# Altium PCB UI_PCB.PcbDoc (part 5 of 5)
Units mm, origin at the board's own origin, x right, y up, seen from the top; angles counter-clockwise.
Board outline 164.97 x 129.99 mm, 4 copper layers (SIG/PWR1, GND1, GNS2, SIG/PWR2), stack 1.18 mm thick; 237 components, 216 nets, 913 pads, 655 vias.
Unrouted connection lines stored in the file: 177.
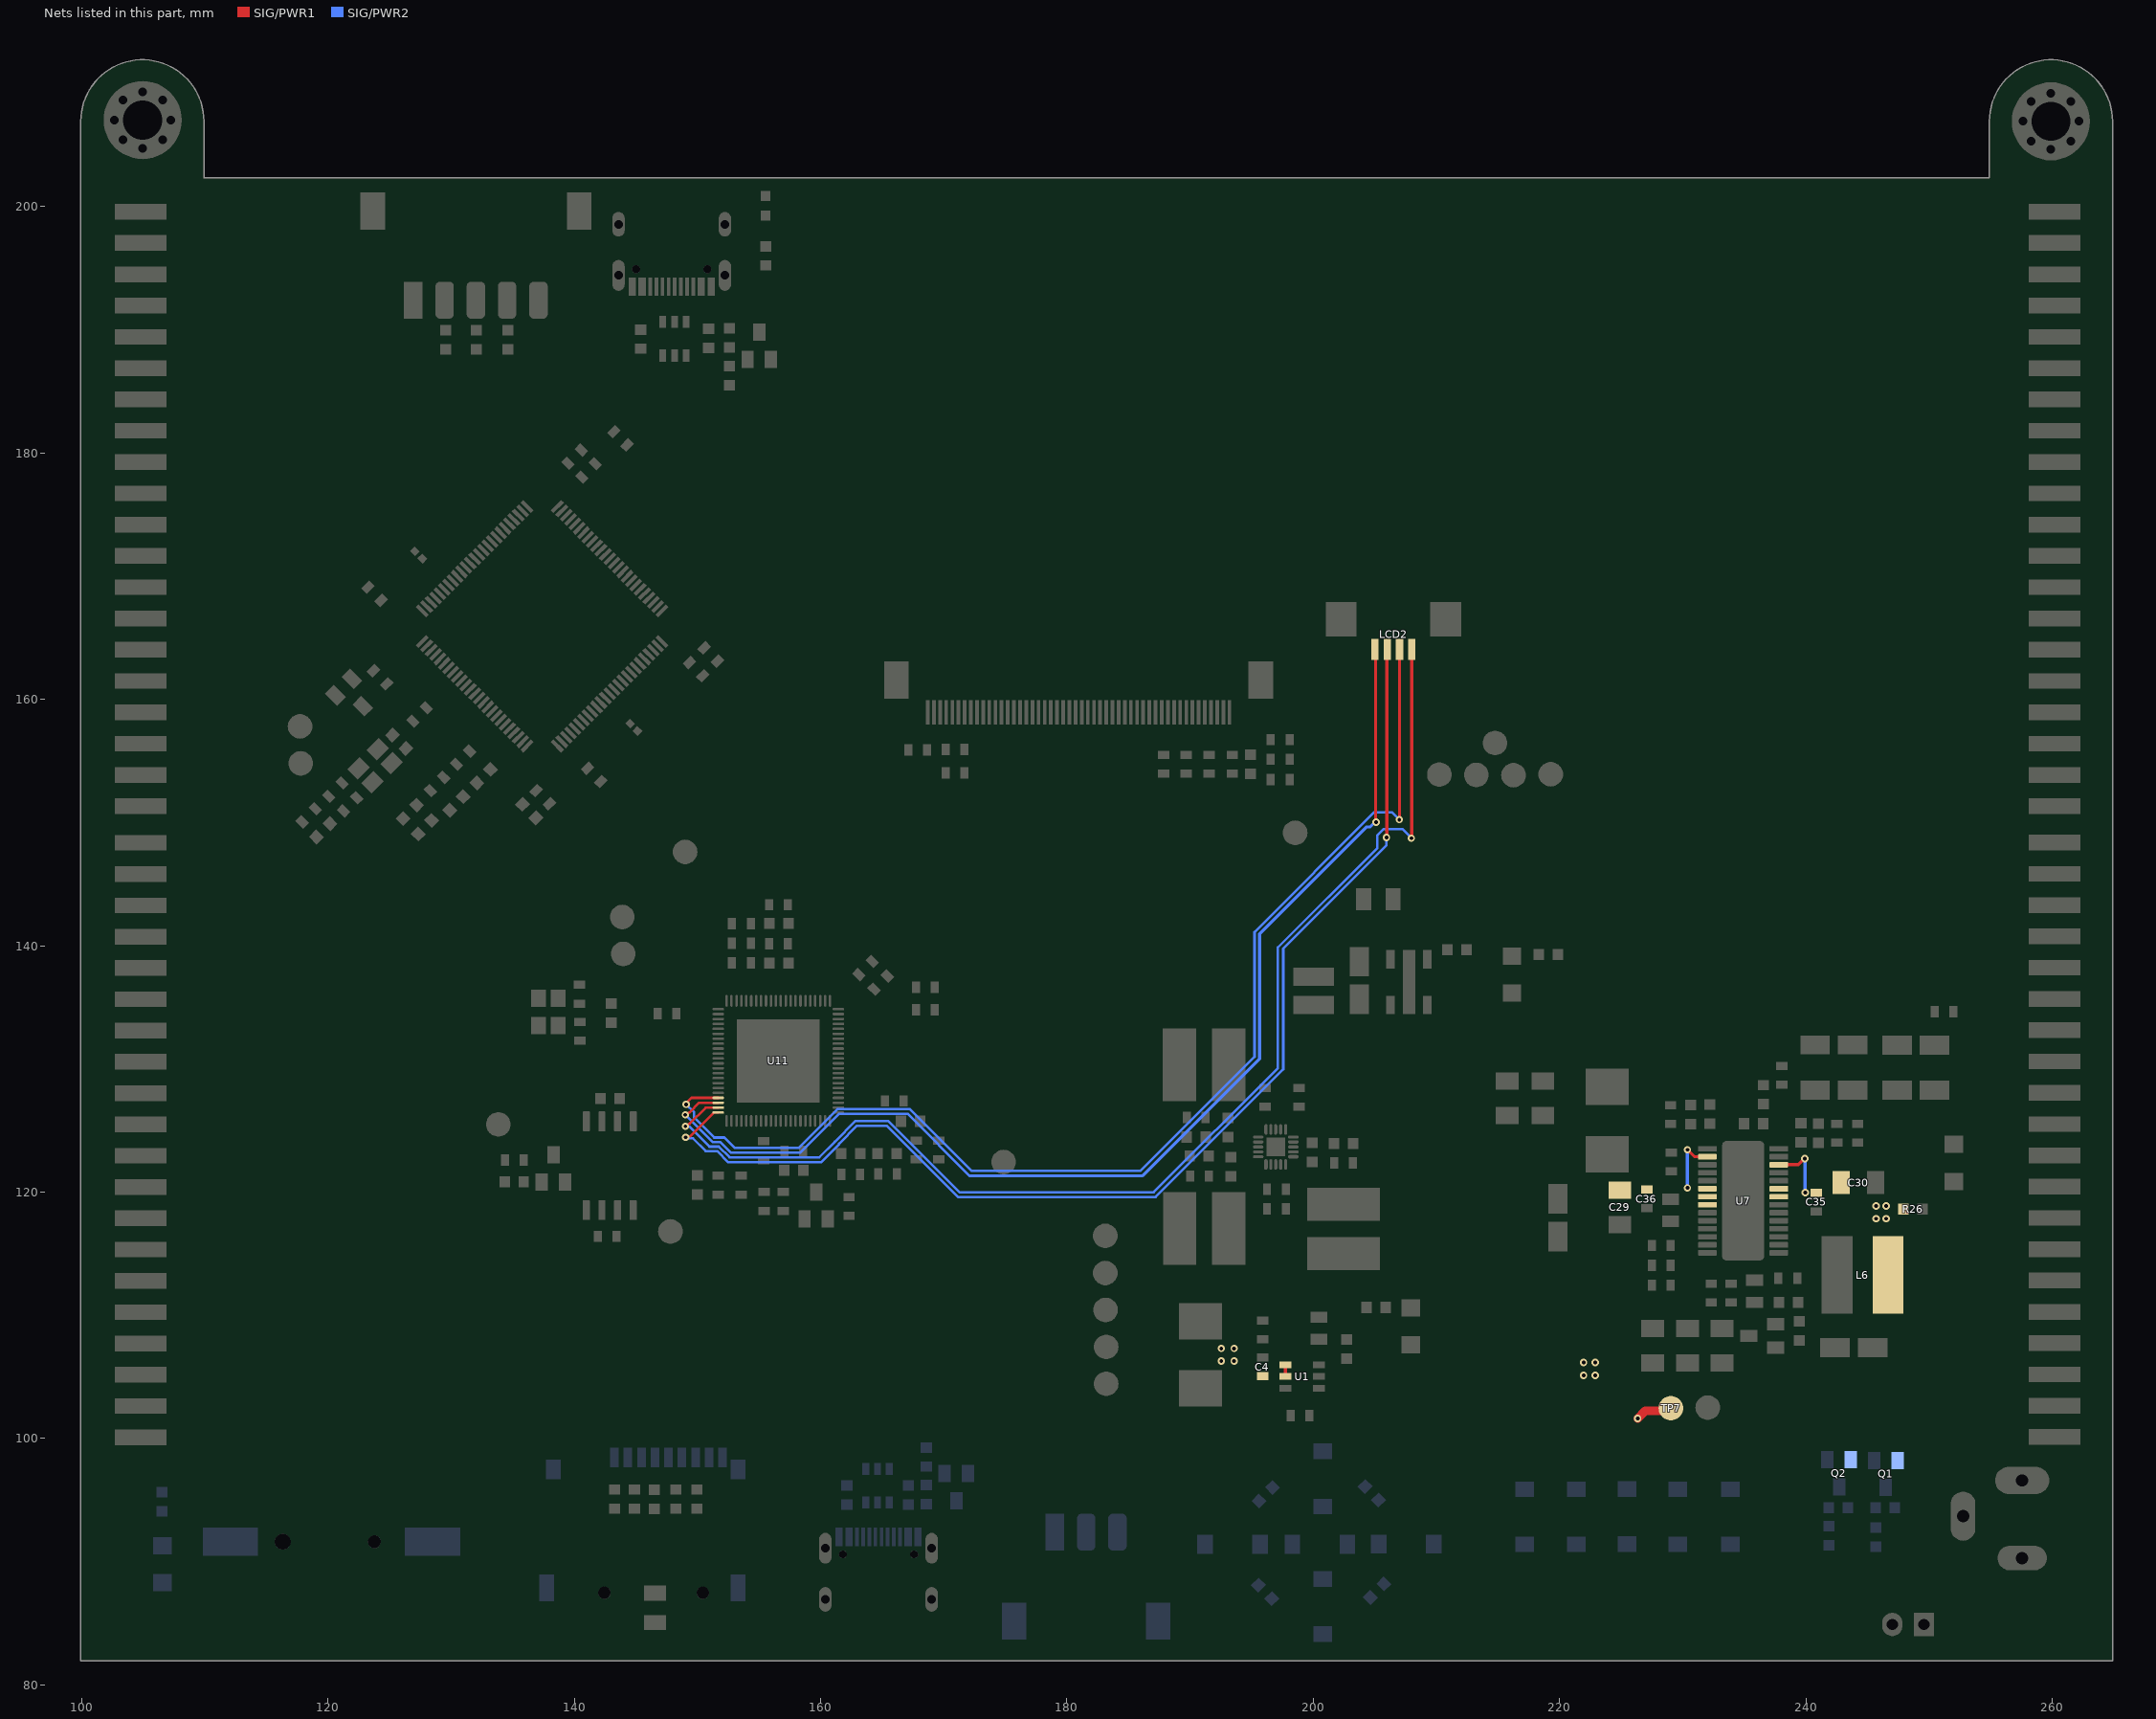
[diagram p6: the nets of this part, all layers, seen from the top]

## Via types
v1: diameter 0.6, hole 0.3, SIG/PWR1 to SIG/PWR2, tented both sides, 644 vias
v2: diameter 0.6, hole 0.3, SIG/PWR1 to SIG/PWR2, tented bottom, 10 vias
v3: diameter 0.8, hole 0.4, SIG/PWR1 to SIG/PWR2, tented both sides, 1 vias

## Nets (pads, with @x,y where several pads share a name; then routed paths per layer and width w, separated by ;. In a path a pad name is that pad's centre, name@x,y a point inside that pad or via, vN(x,y) a via of type N, cw(c..) or ccw(c..) an arc to the next point about the centre after c; other vN are vias at no path point) (continued)
Vsupply: C4.1 C29.2 C30.2 C35.2 C36.2 L6.1 Q1.2 Q2.2 R26.1 TP7.1 U1.4 U1.5 U7.8 U7.9 U7.12 U7.16 U7.20 U7.21 U7.22 | length 14
  SIG/PWR1 w0.254: U1.5@197.726,105.039 U1.4@197.726,105.989 ; v1@230.386,123.444 230.949,122.881 U7.16@231.998,122.881 ; U7.12@237.798,122.23 239.401,122.23 v1(239.903,122.733)
  SIG/PWR1 w0.712: v1(226.339,101.625) 226.964,102.25 228.818,102.25 TP7.1@229.032,102.464
  SIG/PWR2 w0.254: v1(230.378,120.345) v1(230.378,123.444) ; v1(239.903,122.733) 239.928,122.707 239.928,119.99 v1(239.954,119.964)
  other v1: 221.945,105.131 222.885,105.131 221.945,106.172 222.885,106.172 192.532,106.299 193.573,106.299 192.532,107.315 193.573,107.315 245.694,117.856 246.512,117.856 245.694,118.872 246.512,118.872
X+: LCD2.3 U11.63 | length 98
  SIG/PWR1 w0.2: v1(149.085,127.126) 149.085,127.227 149.517,127.659 U11.63@151.688,127.659
  SIG/PWR1 w0.254: v1(206.985,150.241) 206.993,150.25 206.993,164.064 LCD2.3@207.002,164.072
  SIG/PWR2 w0.2: v1(149.085,127.126) 149.733,126.478 149.733,126.06 151.359,124.435 152.186,124.435 153.035,123.585 158.218,123.585 161.382,126.749 167.231,126.749 172.237,121.742 185.979,121.742 195.228,130.992 195.228,141.115 204.958,150.844 206.381,150.844 v1(206.985,150.241)
X-: LCD2.1 U11.64 | length 95.7
  SIG/PWR1 w0.2: v1(149.01,126.276) 149.118,126.276 149.314,126.472 149.356,126.472 150.143,127.259 U11.64@151.688,127.259
  SIG/PWR1 w0.254: LCD2.1@205.002,164.072 205.053,164.021 205.053,150.089 v1(205.105,150.038)
  SIG/PWR2 w0.2: v1(149.01,126.276) 149.023,126.276 151.245,124.054 151.866,124.054 152.712,123.207 158.335,123.207 161.499,126.371 167.05,126.371 172.085,121.336
  SIG/PWR2 w0.254: 172.085,121.336 186.145,121.336 195.646,130.837 195.646,140.96 204.343,149.657 204.631,149.657 205.011,150.038 v1(205.105,150.038)
Y+: LCD2.4 U11.65 | length 101.1
  SIG/PWR1 w0.2: v1(149.023,125.35) 149.131,125.35 149.326,125.545 149.349,125.545 150.664,126.859 U11.65@151.688,126.859
  SIG/PWR1 w0.254: v1(207.963,148.741) 207.982,148.761 207.982,164.053 LCD2.4@208.002,164.072
  SIG/PWR2 w0.2: v1(149.023,125.35) 149.075,125.298 149.378,125.298 150.978,123.698 151.727,123.698 152.595,122.829 159.896,122.829 161.147,124.081 161.147,124.092 162.836,125.781 165.481,125.781 171.272,119.99 187.04,119.99 197.129,130.079 197.129,139.879 205.207,147.956 205.207,148.981 205.704,149.479 207.225,149.479 v1(207.963,148.741)
Y-: LCD2.2 U11.66 | length 98.4
  SIG/PWR1 w0.2: v1(149.042,124.455) 149.118,124.531 149.384,124.531 151.313,126.459 U11.66@151.688,126.459
  SIG/PWR1 w0.254: v1(205.943,148.793) 205.973,148.823 205.973,164.043 LCD2.2@206.002,164.072
  SIG/PWR2 w0.2: v1(149.042,124.455) 149.118,124.378 149.637,124.378 150.673,123.342 151.587,123.342 152.502,122.428 160.018,122.428 161.497,123.907 161.497,123.947 162.953,125.403 165.364,125.403 171.155,119.612 187.197,119.612 197.561,129.976 197.561,139.776 205.943,148.158 v1(205.943,148.793)
pads on no net: BAT1. LCD1.45 LCD1.49 LCD1.50 U7.19 U11.37 U11.38 U11.39 U11.40 U11.72 U11.75 U11.76 U11.77 U11.78 U11.84 U11.85 U11.86 U11.87 USB1.A8 USB1.B8 USB2.A8 USB2.B8

## Polygon pours and split planes (outlines as drawn)
GND on SIG/PWR1 "NONET_L04_P-001" (solid, remove dead copper, pour order 170): 99.924,81.94 264.897,81.94 264.897,210.769 263.728,211.938 101.524,211.938 99.924,210.337
"3V3 LCD" on SIG/PWR1 "3V3_LCD_L01_P169" (solid, remove dead copper, pour order 169): 145.199,182.41 146.342,181.267 143.612,178.537 142.469,179.68
VLED+ on SIG/PWR1 "NONET_L04_P-001" (solid, pour order 108): 169.291,159.664 169.291,164.922 170.637,166.268 196.418,166.268 202.743,159.944 202.743,145.771 208.534,145.771 208.534,141.351 208.534,138.633 210.058,138.633 210.261,138.836 211.201,138.836 211.201,147.396 204.394,147.396 204.394,160.909 197.129,168.173 169.85,168.173 167.513,165.837 167.513,160.985 168.834,159.664
VLED- on SIG/PWR1 "NONET_L04_P-001" (solid, pour order 107): 202.438,137.16 202.438,159.868 196.317,165.989 170.739,165.989 169.545,164.795 169.545,159.41 170.383,159.41 170.383,160.249 170.688,160.553 170.688,164.313 170.866,164.49 195.758,164.49 200.965,159.283 200.965,142.519 197.764,139.319 197.764,137.16
"3V3 LCD" on SIG/PWR1 "NONET_L04_P-001" (solid, pour order 40): 191.846,159.741 187.477,159.741 187.477,162.814 187.63,162.966 187.655,162.941 191.846,162.941
"3V3 LCD" on SIG/PWR1 "NONET_L04_P-001" (solid, pour order 39): 172.339,153.924 170.967,153.924 170.967,164.084 191.999,164.084 191.846,164.084 191.846,157.709 196.977,157.709 196.977,155.118 192.938,155.118 192.938,155.931 191.364,157.505 191.059,157.505 191.059,158.267 190.881,161.671 189.789,162.763 173.33,162.763 172.339,161.773
5V on SIG/PWR1 "NONET_L04_P-001" (solid, pour order 5): 188.925,108.001 194.158,108.001 195.224,109.068 204.927,109.068 204.927,112.116 189.89,112.116 188.925,111.15
3V3 on SIG/PWR1 "NONET_L04_P-001" (solid, pour order 80): 142.926,115.214 145.644,115.214 145.644,120.802 143.358,120.802 142.926,120.371
2.5V on SIG/PWR1 "2.5V_L01_P161" (solid, pour order 161): 158.14,138.106 157.353,138.106 157.353,136.322 156.947,135.915 156.947,134.645 157.582,134.645 158.14,135.204
5V on SIG/PWR1 "NONET_L04_P-001" (solid, pour order 14): 196.545,125.095 196.977,125.095 196.977,126.238 197.739,126.238 197.739,125.095 198.095,125.095 198.095,126.263 199.542,126.263 199.542,127.914 195.453,127.914 195.453,126.644 196.291,125.806 196.545,125.552
NetL3_2 on SIG/PWR1 "NONET_L04_P-001" (solid, pour order 10): 198.78,123.012 198.78,121.945 200.279,120.447 205.537,120.447 205.537,117.627 205.359,117.45 199.492,117.45 198.831,118.11 198.831,121.133 198.145,121.818 198.145,122.809 198.145,123.012
Vsupply on SIG/PWR1 "NONET_L04_P-001" (solid, pour order 124): 221.183,118.643 223.622,118.643 223.622,104.419 221.183,104.419
1.1V on SIG/PWR1 "NONET_L04_P-001" (solid, pour order 17): 190.271,123.831 190.551,124.11 190.551,134.041 187.554,134.041 187.249,133.737 187.249,123.805
5V on SIG/PWR1 "NONET_L04_P-001" (solid, pour order 159): 156.312,186.385 155.575,186.385 153.822,184.633 151.892,184.633 151.892,184.658 150.266,186.284 149.581,186.284 149.581,182.931 149.606,182.905 153.518,182.905 156.312,185.699
NetJ1_3 on SIG/PWR1 "NETJ1_3_L01_P002" (solid, pour order 2): 248.514,99.136 248.514,99.06 248.514,82.753 254.509,82.753 254.533,99.136 248.564,99.136
3V3 on SIG/PWR1 "3V3_L01_P003" (solid, pour order 3): 152.095,94.847 152.095,85.979 141.072,85.979 141.072,94.794
NetR1_1 on SIG/PWR1 "NONET_L04_P-001" (solid, pour order 6): 201.727,108.572 201.727,105.55 199.212,105.55 199.212,108.572
NetC1_1 on SIG/PWR1 "NONET_L04_P-001" (solid, pour order 7): 188.976,105.639 188.976,102.413 189.84,101.549 196.748,101.549 197.358,100.94 198.45,100.94 198.476,100.965 198.476,104.496 197.231,104.496 197.104,104.369 193.446,104.369 192.913,104.902 192.913,105.639
Vsupply on SIG/PWR1 "NONET_L04_P-001" (solid, pour order 8): 192.126,107.721 192.126,105.867 194.005,105.867 195.275,104.597 198.145,104.597 198.272,104.724 198.272,105.385 198.12,105.537 195.605,105.537 194.742,106.401 194.742,107.391 194.412,107.721
5V on SIG/PWR1 "NONET_L04_P-001" (solid, pour order 9): 196.469,122.73 196.887,122.721 198.425,121.183 198.425,110.642 196.469,110.642 196.469,121.31
NetL4_2 on SIG/PWR1 "NONET_L04_P-001" (solid, pour order 12): 196.123,122.606 196.291,122.606 196.291,121.764 195.072,120.193 195.072,113.36 191.313,113.36 191.313,120.117 191.516,120.32 194.666,120.726
NetL5_2 on SIG/PWR1 "NONET_L04_P-001" (solid, pour order 13): 196.291,125.425 195.199,126.441 195.199,126.797 195.199,133.502 191.668,133.502 191.414,133.248 191.44,133.223 191.44,127.254 193.573,127.254 195.637,124.866 196.291,124.866
2.5V on SIG/PWR1 "NONET_L04_P-001" (solid, pour order 15): 190.805,123.495 190.805,113.36 187.808,113.36 187.503,113.665 187.503,123.495
3V3 on SIG/PWR1 "NONET_L04_P-001" (solid, pour order 18): 202.844,124.917 202.844,120.879 205.562,120.879 205.918,120.523 205.918,117.551 205.511,117.145 199.365,117.145 199.06,116.84 199.06,113.589 199.39,113.259 206.4,113.259 207.874,114.732 207.874,124.917
NetR1_1 on SIG/PWR1 "NONET_L04_P-001" (solid, pour order 21): 199.936,108.572 203.276,108.572 203.276,107.34 199.936,107.34
NetD3_2 on SIG/PWR1 "NONET_L04_P-001" (solid, pour order 22): 237.058,116.815 237.058,117.907 239.612,117.907 244.627,117.246 244.627,110.007 246.888,108.407 246.888,106.324 244.221,106.324 244.119,106.324 244.119,106.629 244.119,108.483 241.071,110.007 241.071,115.697 239.954,116.815
NetC31_2 on SIG/PWR1 "NONET_L04_P-001" (solid, pour order 23): 233.324,110.338 233.324,111.684 233.35,111.684 234.874,111.684 234.874,110.312 239.795,110.312 240.233,110.084 243.891,108.306 243.891,106.426 241.122,106.426 241.046,106.502 241.046,108.153 240.513,108.687 236.81,108.687 236.88,108.687
10.4V on SIG/PWR1 "NONET_L04_P-001" (solid, pour order 0): 224.003,107.671 235.788,107.671 235.788,108.871 233.232,110.109 224.003,110.109
Vsupply on SIG/PWR1 "NONET_L04_P-001" (solid, pour order 25): 237.084,119.405 241.681,119.405 241.681,117.907 244.907,117.5 244.907,110.134 247.294,108.433 248.539,108.407 248.539,119.532 244.399,119.532 244.399,121.971 241.63,121.971 240.182,120.523 237.058,120.523
NetC31_2 on SIG/PWR1 "NONET_L04_P-001" (solid, pour order 26): 239.903,115.24 238.43,113.767 238.43,109.753 240.716,109.753 240.716,115.621 239.903,116.332
Vsupply on SIG/PWR1 "NONET_L04_P-001" (solid, pour order 27): 221.209,121.336 228.016,121.336 228.498,120.853 228.524,120.879 230.81,120.879 231.216,120.472 232.715,120.472 232.715,118.745 230.861,118.745 229.845,120.142 228.368,120.142 225.193,118.643 221.183,118.643
NetC42_1 on SIG/PWR1 "NONET_L04_P-001" (solid, pour order 28): 218.796,118.059 220.421,118.059 220.929,118.567 220.929,121.59 228.092,121.59 228.397,121.285 229.591,121.285 230.048,121.742 229.438,122.352 228.346,122.352 226.06,124.638 218.796,124.638
"3V3 LCD" on SIG/PWR1 "NONET_L04_P-001" (solid, pour order 30): 214.554,124.917 214.554,127.737 219.761,127.737 219.761,128.27 221.996,130.505 231.292,130.505 231.292,126.467 231.14,126.314 227.533,126.314 226.136,124.917 217.348,124.917
NetC39_2 on SIG/PWR1 "NONET_L04_P-001" (solid, pour order 32): 241.935,125.095 243.078,125.095 243.078,125.984 244.475,127.381 245.135,127.381 245.135,132.893 245.11,132.867 242.24,132.867 242.24,127.279 241.935,125.984
-7V on SIG/PWR1 "NONET_L04_P-001" (solid, pour order 33): 238.049,126.848 240.386,126.848 240.386,125.019 241.681,125.019 241.681,127.051 242.037,127.406 242.037,129.159 237.592,129.159 237.592,129.057
16V on SIG/PWR1 "NONET_L04_P-001" (solid, pour order 34): 249.072,131.064 249.072,132.842 249.86,133.629 249.86,135.407 251.028,135.407 251.028,133.579 251.79,132.817 251.79,131.013
NetC38_1 on SIG/PWR1 "NONET_L04_P-001" (solid, pour order 35): 243.637,125.959 243.637,125.12 246.431,125.12 248.717,127.406 248.691,127.432 248.691,132.817 246.101,132.817 246.101,127.152 244.907,125.959
VREF- on SIG/PWR1 "NONET_L04_P-001" (solid, pour order 38): 131.394,154.711 131.445,154.661 131.445,154.026 130.073,152.654 130.073,151.74 130.962,150.851 129.337,149.225 128.168,149.225 127.356,150.038 127.356,150.393 129.134,152.171 129.134,152.806 128.105,153.835 129.997,155.626 130.416,155.689
"3V3 LCD" on SIG/PWR1 "NONET_L04_P-001" (solid, pour order 41): 195.471,155.616 195.529,155.089 195.529,153.035 196.977,153.035 196.977,155.616
1.1V on SIG/PWR1 "NONET_L04_P-001" (solid, pour order 49): 163.119,138.328 162.103,137.312 162.103,136.347 161.214,135.458 161.214,134.696 163.068,134.696 164.033,135.661 164.465,135.661 165.125,136.322
NetD1_2 on SIG/PWR1 "NONET_L04_P-001" (solid, pour order 60): 198.272,136.068 198.272,134.341 206.731,134.341 206.731,136.042 205.588,137.185 202.997,137.185 201.879,136.068
10.4V on SIG/PWR1 "NONET_L04_P-001" (solid, pour order 62): 202.743,142.469 202.743,137.414 206.07,137.414 206.756,138.1 206.731,138.125 206.731,142.469
3V on SIG/PWR1 "NONET_L04_P-001" (solid, pour order 68): 157.912,121.056 160.249,120.828 160.249,119.202 156.413,119.202 156.413,120.459 157.709,121.056
3V3 on SIG/PWR1 "NONET_L04_P-001" (solid, pour order 70): 162.865,118.516 160.096,118.516 160.096,117.119 162.865,117.119
3V3 on SIG/PWR1 "NONET_L04_P-001" (solid, pour order 71): 161.112,115.875 161.112,118.504 160.083,118.504 160.083,115.875
3V3 on SIG/PWR1 "NONET_L04_P-001" (solid, pour order 72): 156.091,116.688 156.091,118.984 154.694,118.984 154.694,116.688
3V3 on SIG/PWR1 "NONET_L04_P-001" (solid, pour order 73): 167.437,137.312 164.287,134.163 164.287,133.934 168.58,133.934 168.58,137.312
NetC62_2 on SIG/PWR1 "NONET_L04_P-001" (solid, pour order 76): 168.707,126.365 170.409,124.663 170.409,123.698 167.081,123.698 165.837,124.943 166.911,126.365
3V3 on SIG/PWR1 "NONET_L04_P-001" (solid, pour order 78): 162.255,128.27 165.76,128.27 165.76,126.721 164.668,126.721 164.109,127.279 163.017,127.279 162.712,127.584 162.255,127.584
3V3 on SIG/PWR1 "NONET_L04_P-001" (solid, pour order 98): 151.79,117.805 149.377,117.805 149.377,116.738 151.79,116.738
3V3 on SIG/PWR1 "NONET_L04_P-001" (solid, pour order 99): 151.79,116.738 149.377,116.738 149.377,115.468 151.79,115.468
3V3 on SIG/PWR1 "NONET_L04_P-001" (solid, pour order 100): 156.083,116.738 151.79,116.738 151.79,115.468 156.083,115.468
3V3 on SIG/PWR1 "NONET_L04_P-001" (solid, pour order 101): 156.083,117.805 151.79,117.805 151.79,116.738 156.083,116.738
3V3 on SIG/PWR1 "NONET_L04_P-001" (solid, pour order 104): 128.321,136.271 132.309,136.271 132.309,111.608 128.321,111.608
3V3 on SIG/PWR1 "NONET_L04_P-001" (solid, pour order 105): 156.083,115.468 132.309,115.468 132.309,111.608 156.083,111.608
10.4V on SIG/PWR1 "NONET_L04_P-001" (solid, pour order 109): 205.359,140.995 205.359,145.415 202.743,145.415 202.743,140.995
"3V3 LCD" on SIG/PWR1 "NONET_L04_P-001" (solid, pour order 110): 219.304,147.599 223.495,147.599 223.495,138.303 231.292,130.505 221.996,130.505 219.304,133.198
NetQ5_3 on SIG/PWR1 "NONET_L04_P-001" (solid, pour order 113): 145.22,193.483 145.22,194.767 146.058,195.605 149.699,195.605 150.605,194.7 150.605,193.483 150.315,193.483
NetQ5_3 on SIG/PWR1 "NONET_L04_P-001" (solid, pour order 114): 150.007,193.509 150.012,193.503 150.012,192.178 151.917,190.273 151.917,189.484 153.772,189.484 154.356,188.9 155.677,188.9 155.677,190.779 152.4,190.779 150.597,192.583 150.597,193.509
NetQ5_1 on SIG/PWR1 "NONET_L04_P-001" (solid, pour order 115): 151.943,189.205 153.213,189.205 153.924,188.493 154.711,188.493 154.711,186.792 154.381,186.461 151.943,186.461
1.1V on SIG/PWR1 "NONET_L04_P-001" (solid, pour order 117): 187.427,129.297 183.667,125.451 173.152,125.451 173.152,123.901 187.427,123.901
2.5V on SIG/PWR1 "NONET_L04_P-001" (solid, pour order 118): 189.281,123.495 184.48,123.495 180.416,123.495 183.337,120.574 189.281,120.574
5V on SIG/PWR1 "NONET_L04_P-001" (solid, pour order 151): 164.287,98.831 164.287,103.53 172.263,103.53 172.263,98.704 171.501,98.704 170.205,100 166.319,100 165.151,98.831
5V on SIG/PWR1 "NONET_L04_P-001" (solid, pour order 153): 101.257,98.425 116.053,98.425 128.372,110.744 165.049,110.744 172.39,103.403 164.287,103.403 164.287,103.81 159.969,108.128 130.15,108.128 117.678,95.656 101.257,95.656
3V3 on SIG/PWR1 "NONET_L04_P-001" (solid, pour order 156): 162.865,118.516 171.323,118.516 171.323,126.009 171.907,126.009 172.491,125.425 172.491,117.602 172.491,117.145 162.865,117.145
GND on SIG/PWR2 "NONET_L04_P-001" (solid, remove dead copper, pour order 167): 99.924,81.94 264.897,81.94 264.897,210.769 263.728,211.938 101.524,211.938 99.924,210.337
"3V3 LCD" on SIG/PWR2 "NONET_L04_P-001" (solid, pour order 87): 122.86,165.887 137.058,151.689 151.282,165.913 137.084,180.111
"3V3 LCD" on SIG/PWR2 "NONET_L04_P-001" (solid, pour order 46): 219.304,176.2 170.993,176.2 170.993,162.763 191.999,162.763 191.999,164.363 195.809,168.173 219.304,168.173
3V3 on SIG/PWR2 "3V3_L04_P163" (solid, pour order 163): 128.321,136.296 140.513,136.296 147.091,136.296 147.091,133.477 134.391,133.477 128.321,133.477
"3V3 LCD" on SIG/PWR2 "NONET_L04_P-001" (solid, pour order 146): 142.748,174.447 142.748,179.883 145.237,182.372 251.308,182.372 253.898,184.963 253.898,175.971 148.692,175.971 148.692,167.889
"3V3 LCD" on SIG/PWR2 "NONET_L04_P-001" (solid, pour order 103): 133.464,155.385 129.464,151.384 129.464,148.336 132.309,148.336 133.706,148.336 137.058,151.689
1.1V on SIG/PWR2 "NONET_L04_P-001" (solid, pour order 69): 156.591,136.855 155.194,136.855 155.194,135.661 155.829,135.026 166.04,135.026 173.152,127.914 173.152,125.222 173.152,124.003 174.701,124.003 174.701,128.753 167.03,136.423 156.591,136.423
1.1V on SIG/PWR2 "NONET_L04_P-001" (solid, pour order 134): 157.531,135.207 157.531,127.051 154.495,124.015 154.305,123.977 153.721,123.977 153.721,125.324 155.194,126.797 155.194,135.999
2.5V on SIG/PWR2 "NONET_L04_P-001" (solid, pour order 47): 185.554,122.53 181.407,122.53 167.246,136.69 156.87,136.69 156.87,137.528 157.417,138.074 169.246,138.074
3V3 on SIG/PWR2 "NONET_L04_P-001" (solid, pour order 143): 141.707,113.36 139.598,113.36 139.598,90.094 141.072,88.621 141.072,86.741 152.095,86.741 152.095,95.606 152.07,95.58 142.494,95.58 141.707,96.368
3V3 on SIG/PWR2 "3V3_L04_P166" (solid, pour order 166): 148.247,129.489 151.003,126.733 151.003,125.222 151.219,125.006 151.774,125.006 151.93,125.162 151.93,128.715 151.155,129.489
10.4V on SIG/PWR2 "10.4V_L04_P164" (solid, pour order 164): 223.622,110.312 211.785,110.312 211.785,110.617 209.042,110.617 209.042,108.636 210.337,107.34 223.622,107.34
Vsupply on SIG/PWR2 "NONET_L04_P-001" (solid, pour order 165): 207.391,100.076 204.648,100.101 204.648,105.512 207.417,105.512
10.4V on SIG/PWR2 "NONET_L04_P-001" (solid, pour order 127): 209.042,128.422 211.785,128.422 211.785,110.617 209.042,110.617
3V3 on SIG/PWR2 "NONET_L04_P-001" (solid, pour order 75): 146.914,136.246 147.091,136.423 148.641,136.423 151.155,133.909 151.155,127.914 148.488,127.914 146.939,129.464 146.939,136.246
5V on SIG/PWR2 "NONET_L04_P-001" (solid, pour order 150): 107.086,199.568 109.195,197.46 140.157,197.46 142.367,195.25 142.367,186.614 144.288,184.693 149.533,184.693 149.533,182.908 149.511,182.931 143.561,182.931 140.513,185.979 140.513,194.158 139.421,195.25 109.169,195.25 107.137,193.218 106.756,193.218 106.756,199.568 106.731,199.593
5V on SIG/PWR2 "NONET_L04_P-001" (solid, pour order 162): 156.312,186.385 155.575,186.385 153.822,184.633 151.892,184.633 151.892,184.658 150.266,186.284 149.581,186.284 149.581,182.931 149.606,182.905 153.518,182.905 156.312,185.699
GND on SIG/PWR2 "NONET_L04_P-001" (solid, pour order 1): 127.533,168.275 126.505,167.246 124.562,169.189 125.59,170.218
NetC81_2 on SIG/PWR2 "NETC81_2_L04_P036" (solid, pour order 36): 202.895,95.428 206.045,92.278 206.045,90.551 203.327,87.833 197.714,87.833 194.97,90.576 194.97,92.227 198.171,95.428 199.796,95.428
9V on SIG/PWR2 "NONET_L04_P-001" (solid, pour order 37): 260.121,99.797 260.121,93.955 247.828,93.955 247.828,93.751 246.634,93.751 246.431,93.955 246.431,94.971 246.278,95.123 245.44,95.123 245.11,95.453 245.11,96.698 245.44,97.028 248.488,97.028 251.257,99.797
VBAT on SIG/PWR2 "NONET_L04_P-001" (solid, pour order 42): 241.868,96.783 242.164,97.079 243.256,97.079 243.459,96.876 244.526,95.809 244.526,89.713 248.26,85.979 248.26,83.668 247.574,82.982 243.332,82.982 241.868,84.446 241.868,95.284
"3V3 LCD" on SIG/PWR2 "NONET_L04_P-001" (solid, pour order 45): 223.495,144.196 223.495,176.606 219.304,176.606 219.304,144.196
3V3 on SIG/PWR2 "NONET_L04_P-001" (solid, pour order 74): 160.63,122.098 161.163,121.564 161.163,115.875 155.88,115.875 154.889,116.865 154.889,120.574 155.397,121.082 155.397,122.098
3V3 on SIG/PWR2 "NONET_L04_P-001" (solid, pour order 82): 141.122,128.016 131.369,128.016 131.369,127.025 141.122,127.025
3V3 on SIG/PWR2 "NONET_L04_P-001" (solid, pour order 96): 156.083,116.738 153.772,116.738 153.772,115.468 156.083,115.468
3V3 on SIG/PWR2 "NONET_L04_P-001" (solid, pour order 97): 156.083,117.805 153.772,117.805 153.772,116.738 156.083,116.738
10.4V on SIG/PWR2 "NONET_L04_P-001" (solid, pour order 111): 223.622,110.312 226.72,110.312 226.72,107.34 223.622,107.34
NetQ6_3 on SIG/PWR2 "NONET_L04_P-001" (solid, pour order 119): 162.001,92.013 162.001,90.729 162.839,89.891 166.48,89.891 167.386,90.796 167.386,92.013 167.096,92.013
NetQ6_3 on SIG/PWR2 "NONET_L04_P-001" (solid, pour order 120): 166.788,91.987 166.793,91.993 166.793,92.93 167.945,94.082 167.945,95.326 169.867,95.326 170.375,95.834 171.679,95.834 171.679,94.082 168.622,94.082 167.386,92.845 167.386,91.987
NetQ6_1 on SIG/PWR2 "NONET_L04_P-001" (solid, pour order 121): 167.907,95.638 169.177,95.638 169.888,96.349 170.676,96.349 170.676,98.051 170.346,98.381 167.907,98.381
10.4V on SIG/PWR2 "NONET_L04_P-001" (solid, pour order 122): 203.81,142.519 206.553,142.519 206.553,131.166 203.81,131.166
Vsupply on SIG/PWR2 "NONET_L04_P-001" (solid, pour order 123): 244.831,119.659 247.574,119.659 247.574,100.076 244.831,100.076
Vsupply on SIG/PWR2 "NONET_L04_P-001" (solid, pour order 125): 191.745,105.41 191.745,108.153 203.098,108.153 203.098,105.41
10.4V on SIG/PWR2 "NONET_L04_P-001" (solid, pour order 126): 203.81,128.422 203.81,131.166 211.785,131.166 211.785,128.422
Vsupply on SIG/PWR2 "NONET_L04_P-001" (solid, pour order 128): 203.098,105.41 203.098,108.153 207.416,108.153 207.416,105.41
Vsupply on SIG/PWR2 "NONET_L04_P-001" (solid, pour order 130): 244.831,102.819 244.831,100.076 207.391,100.076 207.391,102.819
Vsupply on SIG/PWR2 "NONET_L04_P-001" (solid, pour order 131): 221.183,106.782 223.622,106.782 223.622,102.819 221.183,102.819
Vsupply on SIG/PWR2 "NONET_L04_P-001" (solid, pour order 132): 242.087,98.095 248.768,98.095 248.768,100 247.472,101.295 239.141,101.295 239.141,101.041
"3V3 LCD" on SIG/PWR2 "NONET_L04_P-001" (solid, pour order 135): 125.044,148.336 129.464,148.336 129.464,151.384 127.61,151.384 125.044,148.819
"3V3 LCD" on SIG/PWR2 "NONET_L04_P-001" (solid, pour order 137): 139.255,177.94 137.77,179.426 137.77,191.237 136.373,191.237 136.373,188.214 136.017,187.858 132.867,187.858 132.867,187.096 136.093,187.096 136.449,186.741 136.449,179.426
3V3 on SIG/PWR2 "NONET_L04_P-001" (solid, pour order 139): 203.759,124.917 203.759,121.234 197.714,115.189 161.849,115.189 160.934,116.103 153.772,116.103 153.772,115.468 157.582,111.658 199.466,111.658 207.874,120.066 207.874,124.917
"3V3 LCD" on SIG/PWR2 "NONET_L04_P-001" (solid, pour order 140): 107.671,98.679 110.541,98.679 110.541,165.608 108.331,165.608 107.671,164.948
"3V3 LCD" on SIG/PWR2 "NONET_L04_P-001" (solid, pour order 141): 123.266,165.887 108.61,165.887 108.331,165.608 110.541,163.398 110.541,163.347 121.996,163.347 122.479,163.83 125.324,163.83
"3V3 LCD" on SIG/PWR2 "NONET_L04_P-001" (solid, pour order 144): 252.4,152.502 255.6,152.502 255.6,200.279 252.4,200.279
5V on SIG/PWR2 "NONET_L04_P-001" (solid, pour order 149): 107.163,201.092 101.549,201.092 101.549,95.656 103.81,95.656 107.188,99.035 107.163,99.06
5V on SIG/PWR2 "NONET_L04_P-001" (solid, pour order 152): 164.287,98.831 164.287,103.53 172.263,103.53 172.263,98.704 171.501,98.704 170.205,100 166.319,100 165.151,98.831
5V on SIG/PWR2 "NONET_L04_P-001" (solid, pour order 154): 203.606,111.328 172.085,111.328 164.287,103.53 172.263,103.53 177.267,108.534 203.606,108.534
3V3 on SIG/PWR2 "NONET_L04_P-001" (solid, pour order 158): 165.837,134.823 172.517,128.143 172.517,125.095 172.237,124.816 171.552,124.816 171.348,125.019 171.348,127.864 165.684,133.528 164.008,133.528 164.008,127.457 163.195,127.457 162.89,127.762 162.89,134.417 163.297,134.823 165.125,134.823
5V on SIG/PWR2 "NONET_L04_P-001" (solid, pour order 160): 156.264,186.363 155.527,186.363 153.775,184.61 151.844,184.61 151.844,184.706 150.289,186.261 149.485,186.261 149.485,182.931 153.518,182.931 156.264,185.677
GND on GNS2 (split plane): 260.771,211.347 261.339,211.194 261.883,210.969 262.392,210.675 262.859,210.316 263.275,209.9 263.634,209.433 263.928,208.924 264.153,208.38 264.306,207.812 264.383,207.225 264.386,206.931 264.386,82.451 100.434,82.451 100.434,206.894 100.434,206.896 100.438,206.934 100.438,207.228 100.515,207.812 100.667,208.38 100.892,208.924 101.186,209.433 101.545,209.9 101.961,210.316 102.428,210.675 102.937,210.969 103.481,211.194 104.05,211.347 104.633,211.423 105.222,211.423 105.805,211.347 106.374,211.194 106.917,210.969 107.427,210.675 107.894,210.316 108.31,209.9 108.668,209.433 108.963,208.924 109.188,208.38 109.34,207.812 109.417,207.228 109.417,206.934 109.417,206.933 109.421,202.336 109.426,202.286 109.431,202.237 109.431,202.236 109.445,202.188 109.46,202.141 109.483,202.096 109.507,202.053 109.507,202.052 109.539,202.014 109.57,201.975 109.571,201.975 109.61,201.943 109.648,201.912 109.694,201.887 109.736,201.865 109.786,201.85 109.832,201.836 109.883,201.831 109.931,201.826 156.664,201.826 156.664,200.965 156.674,200.865 156.703,200.77 156.75,200.681 156.813,200.604 156.891,200.54 156.979,200.493 157.075,200.464 157.174,200.454 211.734,200.454 211.833,200.464 211.929,200.493 212.017,200.54 212.095,200.604 212.158,200.681 212.205,200.77 212.234,200.865 212.244,200.965 212.244,201.826 254.893,201.826 254.992,201.836 255.088,201.865 255.176,201.912 255.254,201.975 255.317,202.053 255.364,202.141 255.393,202.237 255.403,202.336 255.403,206.934 255.403,207.228 255.48,207.812 255.632,208.38 255.858,208.924 256.152,209.433 256.51,209.9 256.926,210.316 257.393,210.675 257.903,210.969 258.447,211.194 259.015,211.347 259.599,211.423 260.187,211.423
GND on GND1 (split plane): 260.771,211.347 261.339,211.194 261.883,210.969 262.392,210.675 262.859,210.316 263.275,209.9 263.634,209.433 263.928,208.924 264.153,208.38 264.306,207.812 264.383,207.225 264.386,206.931 264.386,82.451 100.434,82.451 100.434,206.894 100.434,206.896 100.438,206.934 100.438,207.228 100.515,207.812 100.667,208.38 100.892,208.924 101.186,209.433 101.545,209.9 101.961,210.316 102.428,210.675 102.937,210.969 103.481,211.194 104.05,211.347 104.633,211.423 105.222,211.423 105.805,211.347 106.374,211.194 106.917,210.969 107.427,210.675 107.894,210.316 108.31,209.9 108.668,209.433 108.963,208.924 109.188,208.38 109.34,207.812 109.417,207.228 109.417,206.934 109.417,206.933 109.421,202.336 109.426,202.286 109.431,202.237 109.431,202.236 109.445,202.188 109.46,202.141 109.483,202.096 109.507,202.053 109.507,202.052 109.539,202.014 109.57,201.975 109.571,201.975 109.61,201.943 109.648,201.912 109.694,201.887 109.736,201.865 109.786,201.85 109.832,201.836 109.883,201.831 109.931,201.826 156.664,201.826 156.664,200.965 156.674,200.865 156.703,200.77 156.75,200.681 156.813,200.604 156.891,200.54 156.979,200.493 157.075,200.464 157.174,200.454 211.734,200.454 211.833,200.464 211.929,200.493 212.017,200.54 212.095,200.604 212.158,200.681 212.205,200.77 212.234,200.865 212.244,200.965 212.244,201.826 254.893,201.826 254.992,201.836 255.088,201.865 255.176,201.912 255.254,201.975 255.317,202.053 255.364,202.141 255.393,202.237 255.403,202.336 255.403,206.934 255.403,207.228 255.48,207.812 255.632,208.38 255.858,208.924 256.152,209.433 256.51,209.9 256.926,210.316 257.393,210.675 257.903,210.969 258.447,211.194 259.015,211.347 259.599,211.423 260.187,211.423

## Other copper
SIG/PWR1:
  pour cut-out: 148.158,117.97 149.123,117.97 149.123,116.98 148.285,116.98 148.158,117.107
SIG/PWR2:
  pour cut-out: 150.063,101.539 150.978,101.539 150.978,100.752 150.8,100.574 150.063,100.574
  pour cut-out: 146.202,101.539 147.117,101.539 147.117,100.752 146.939,100.574 146.202,100.574
  pour cut-out: 250.393,136.531 251.358,136.531 251.358,135.541 250.52,135.541 250.393,135.668
  pour cut-out: 244.069,142.062 245.034,142.062 245.034,141.072 244.196,141.072 244.069,141.199
  pour cut-out: 129.642,159.207 133.045,162.611 136.868,158.788 133.464,155.385
  pour cut-out: 135.941,174.625 139.255,177.94 142.748,174.447 139.513,171.213

## Silkscreen, mask and mechanical layers (free items; w line width, h text height)
Top Overlay:
  drawing of 59 lines, arcs and shapes, not listed
  text "PA15" at 107.67,198.932 h1.02
  text "3V3" at 254.959,198.907 h1.02
  text "PB10" at 107.67,196.392 h1.02
  text "GND" at 254.959,196.367 h1.02
  text "PC11" at 107.67,193.852 h1.02
  text "PC9" at 254.959,193.827 h1.02
  text "STM_USB" at 153.593,192.489 h1.02
  text "PC12" at 107.67,191.312 h1.02
  text "PC8" at 254.959,191.287 h1.02
  text "SWD port" at 118.592,189.568 h1.02
  text "PD0" at 107.67,188.772 h1.02
  text "PC7" at 254.959,188.747 h1.02
  text "PD1" at 107.67,186.232 h1.02
  text "PC6" at 254.959,186.207 h1.02
  text "PD2" at 107.67,183.692 h1.02
  text "PD15" at 254.113,183.667 h1.02
  text "GND" at 127.585,182.041 h1.02 r90
  text "SWCLK" at 130.125,182.041 h1.02 r90
  text "SWO" at 132.665,182.041 h1.02 r90
  text "SWDIO" at 135.205,182.041 h1.02 r90
  text "3V3" at 137.745,182.041 h1.02 r90
  text "PD3" at 107.67,181.152 h1.02
  text "PD14" at 254.113,181.127 h1.02
  text "PD7" at 107.67,178.612 h1.02
  text "PD13" at 254.113,178.587 h1.02
  text "V1.0" at 215.605,176.743 h3
  text "PD4" at 107.67,176.072 h1.02
  text "PD12" at 254.113,176.047 h1.02
  text "PD7" at 107.67,173.532 h1.02
  text "PD11" at 254.451,173.507 h1.02
  text "PD6" at 107.67,170.992 h1.02
  text "PD10" at 254.113,170.967 h1.02
  text "PB4" at 107.67,168.452 h1.02
  text "PD9" at 254.959,168.427 h1.02
  text "PB5" at 107.67,165.912 h1.02
  text "PD8" at 254.959,165.887 h1.02
  text "PB6" at 107.67,163.372 h1.02
  text "PB15" at 254.113,163.347 h1.02
  text "PB7" at 107.67,160.832 h1.02
  text "PB14" at 254.113,160.807 h1.02
  text "X-" at 207.798,159.689 h1.02 r90
  text "X+" at 204.877,159.664 h1.02 r90
  text "Y+" at 206.375,159.664 h1.02 r90
  text "Y-" at 209.246,159.664 h1.02 r90
  text "GND" at 212.394,158.724 h1.02
  text "PB8" at 107.67,158.292 h1.02
  text "PB13" at 254.113,158.267 h1.02
  text "VBAT" at 115.824,156.972 h1.02 r90
  text "PB9" at 107.67,155.752 h1.02
  text "PB12" at 254.113,155.727 h1.02
  text "PE0" at 107.67,153.212 h1.02
  text "3V3" at 254.959,153.187 h1.02
  text "PE1" at 107.67,150.672 h1.02
  text "GND" at 254.959,150.647 h1.02
  text "SRST" at 115.901,149.504 h1.02 r90
  text "3V3" at 107.67,147.701 h1.02
  text "PB11" at 254.451,147.701 h1.02
  text "-7V" at 220.269,145.694 h1.02 r90
  text "10V4" at 211.201,145.669 h1.02 r90
  text "16V" at 214.199,145.643 h1.02 r90
  text "L3V3" at 217.221,145.618 h1.02 r90
  text "LRST" at 190.906,145.491 h1.02
  text "GND" at 107.67,145.161 h1.02
  text "PB10" at 254.113,145.161 h1.02
  text "GND" at 146.685,143.713 h1.02
  text "PE2" at 107.67,142.621 h1.02
  text "PE15" at 254.113,142.621 h1.02
  text "TX" at 136.855,141.249 h1.02
  text "PE3" at 107.67,140.081 h1.02
  text "PE14" at 254.113,140.081 h1.02
  text "RX" at 136.982,138.252 h1.02
  text "NC/VD" at 123.037,137.896 h1.02
  text "PE4" at 107.67,137.541 h1.02
  text "PE13" at 254.113,137.541 h1.02
  text "3V3" at 211.759,135.585 h1.02
  text "PE5" at 107.67,135.001 h1.02
  text "PE12" at 254.113,135.001 h1.02
  text "LCD" at 211.81,134.035 h1.02
  text "PE6" at 107.67,132.461 h1.02
  text "PE11" at 254.451,132.461 h1.02
  text "PC13" at 107.67,129.921 h1.02
  text "PE10" at 254.113,129.921 h1.02
  text "PC14" at 107.67,127.381 h1.02
  text "PE9" at 254.959,127.381 h1.02
  text "PC15" at 107.67,124.841 h1.02
  text "PE8" at 254.959,124.841 h1.02
  text "FEL" at 125.476,124.434 h1.02
  text "PC0" at 107.67,122.301 h1.02
  text "PE7" at 254.959,122.301 h1.02
  text "PC1" at 107.67,119.761 h1.02
  text "PB1" at 255.298,119.761 h1.02
  text "BTNARR" at 173.482,118.211 h1.02
  text "EX FLASH" at 132.41,117.5 h1.02
  text "PC2" at 107.67,117.221 h1.02
  text "PB0" at 254.959,117.221 h1.02
  text "1V1" at 174.65,115.493 h1.02
  text "PC3" at 107.67,114.681 h1.02
  text "PC5" at 254.959,114.681 h1.02
  text "FRST" at 141.02,112.699 h1.02
  text "2V5" at 174.65,112.471 h1.02
  text "PA0" at 107.67,112.141 h1.02
  text "PC4" at 254.959,112.141 h1.02
  text "Vsupply" at 249.903,111.15 h1.02 r90
  text "PA1" at 107.67,109.601 h1.02
  text "PA7" at 254.959,109.601 h1.02
  text "3V3" at 174.675,109.474 h1.02
  text "5V" at 209.753,107.238 h1.02
  text "PA2" at 107.67,107.061 h1.02
  text "PA6" at 254.959,107.061 h1.02
  text "5V" at 174.726,106.476 h1.02
  text "5V" at 107.67,104.521 h1.02
  text "PA5" at 254.959,104.521 h1.02
  text "GND" at 174.726,103.479 h1.02
  text "GND" at 107.67,101.981 h1.02
  text "PA4" at 254.959,101.981 h1.02
  text "VSUPPLY GND" at 208.254,101.269 h1.02
  text "3V3" at 107.67,99.441 h1.02
  text "PA3" at 254.959,99.441 h1.02
  text "Must be at 9V INPUT!" at 237.591,98.12 h1.02
  text "3V3: off" at 190.296,98.094 h1.02
  text "3V3 battery cell" at 114.147,97.9 h1.02
  text "USB-C for F1C" at 158.902,96.977 h1.02
  text "Reason:" at 237.591,96.647 h1.02
  text "If RTC not used," at 114.223,96.129 h1.02
  text "0V:" at 190.474,95.707 h1.02
  text "Bootloading port" at 158.953,95.334 h1.02
  text "Boost to 10V4" at 237.667,95.123 h1.02
  text "Control inputs" at 216.027,95.055 h1.02
  text "Audio port" at 174.777,94.521 h1.02
  text "battery removable" at 114.173,94.445 h1.02
  text "Minimum voltage" at 237.667,93.582 h1.02
  text "for FEL mode" at 158.927,93.522 h1.02
  text "1/2:" at 190.296,93.37 h1.02
  text "3 separate manual resets" at 215.95,93.175 h1.02
  text "Recommend" at 174.853,92.557 h1.02
  text "TPS65160: 8V" at 237.693,91.922 h1.02
  text "Change RES val for" at 197.104,91.524 h1.02
  text "FEL+LowPwrWkup" at 216.027,91.372 h1.02
  text "2/3:" at 190.22,91.236 h1.02
  text "PAM8403 modules" at 174.802,90.728 h1.02
  text "any convinient Analog" at 197.053,89.721 h1.02
  text "3/4:" at 190.322,89.052 h1.02
  text "NO FUSE!" at 237.794,88.468 h1.02
  text "Threshold" at 197.002,87.604 h1.02
  text "4/5:" at 190.271,86.512 h1.02
  text "enter Flash/FEL" at 138.989,83.108 h1.02 r90
  text "Can be used for" at 135.814,82.981 h1.02 r90
  text "bootload, if not" at 137.323,82.88 h1.02 r90
Bottom Overlay:
  circle w0.512: c210.769,96.469 r0.75
  lines w0.2: 101.041,100.178 264.16,100.178
  lines w0.254: 108.636,82.931 108.636,100.178 ; 133.248,82.931 133.248,100.178 ; 157.277,82.906 157.277,100.152 ; 173.863,82.931 173.863,100.178 ; 189.713,82.931 189.713,100.178 ; 215.189,82.931 215.189,100.178 ; 237.033,82.931 237.033,100.178
  lines w0.3: 240.785,84.451 240.995,83.414
  lines w0.512: 208.284,97.024 207.696,96.469 ; 208.298,95.901 207.696,96.469 ; 209.22,96.469 207.696,96.469 ; 210.201,98.941 210.769,99.543 ; 210.214,93.984 210.769,93.396 ; 210.769,94.92 210.769,93.396 ; 210.769,98.019 210.769,99.543 ; 211.324,98.955 210.769,99.543 ; 211.338,93.998 210.769,93.396 ; 212.319,96.469 213.843,96.469 ; 213.241,97.038 213.843,96.469 ; 213.255,95.914 213.843,96.469
  text "G" at 182.093,94.894 h1.02
  text "L" at 184.506,94.894 h1.02
  text "R" at 179.401,94.843 h1.02
  text "F1C_USB" at 158.055,92.887 h1.02 r270
  text "RTC_BAT" at 131.385,92.633 h1.02 r270
  text "SD_CARD" at 134.103,92.557 h1.02 r270
  text "3V3" at 101.473,90.22 h1.02 r270
  text "9V-1A+" at 250.876,87.604 h1.02
  text "+" at 247.219,86.571 h1.02
  text "-" at 249.911,86.461 h1.02
  text "PWR_IN" at 244.526,85.386 h1.02
  text "JACK PIN" at 245.364,83.286 h1.02
  text "SRST" at 224.51,82.981 h1.02 r270
  text "WKUP" at 216.204,82.956 h1.02 r270
  text "FEL" at 220.395,82.956 h1.02 r270
  text "FRST" at 228.625,82.956 h1.02 r270
  text "LRST" at 232.892,82.956 h1.02 r270
Mechanical 1:
  lines w0.254: 99.924,81.915 99.924,206.934 ; 99.924,81.94 264.897,81.94 264.897,206.934 ; 99.927,206.934 cw(c104.927,206.934) 109.927,206.934 109.927,202.34 ; 109.931,202.336 254.893,202.336 ; 254.893,202.34 254.893,206.934 cw(c259.893,206.934) 264.893,206.934

## Text inside footprints (layer, text, board x,y; h text height)
C3: Top Overlay "+" at 203.873,146.49 h1.02 r180
C61: Top Overlay "+" at 149.432,84.473 h1.02 r90
D2: Top Overlay "+" at 155.219,197.612 h1.02
D9: Bottom Overlay "+" at 107.518,93.37 h1.02 r180
D10: Top Overlay "+" at 251.562,118.847 h1.02
D11: Top Overlay "+" at 208.915,112.573 h1.02 r180
D12: Top Overlay "+" at 216.56,141.097 h1.02 r180